# Altium PCB Main.PcbDoc (part 3 of 3)
Units mm, origin at the board's own origin, x right, y up, seen from the top; angles counter-clockwise.
Board outline 231.52 x 36.7 mm, 2 copper layers (Top Layer, Bottom Layer); 134 components, 130 nets, 558 pads, 347 vias.
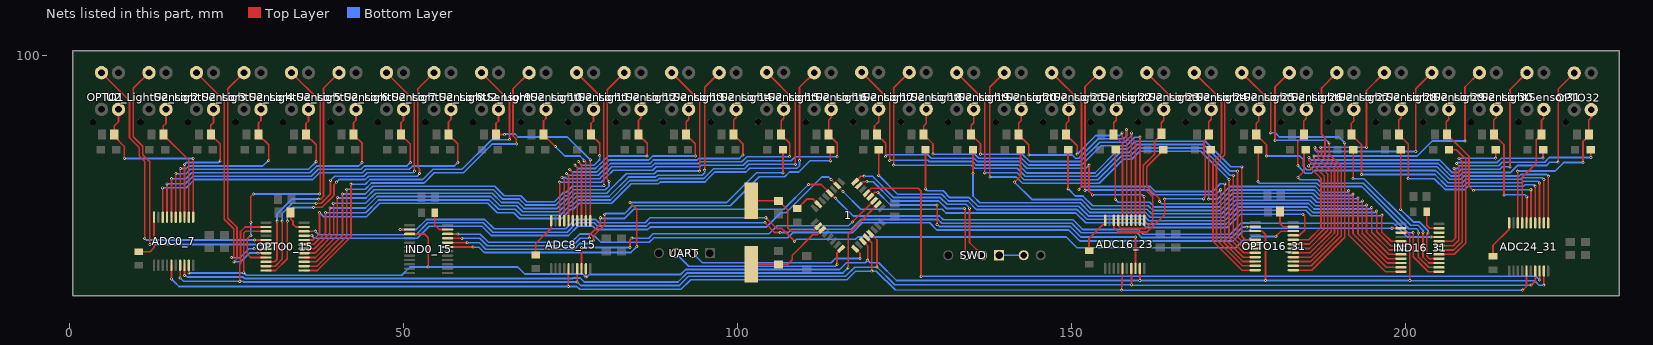
[diagram p2: the nets of this part, all layers, seen from the top]

## Via types
v1: diameter 0.45, hole 0.2, Top Layer to Bottom Layer, 297 vias
v2: diameter 1.27, hole 0.711, Top Layer to Bottom Layer, 44 vias
v3: diameter 3.5, hole 3, Top Layer to Bottom Layer, 6 vias

## Nets (pads, with @x,y where several pads share a name; then routed paths per layer and width w, separated by ;. In a path a pad name is that pad's centre, name@x,y a point inside that pad or via, vN(x,y) a via of type N, cw(c..) or ccw(c..) an arc to the next point about the centre after c; other vN are vias at no path point) (continued)
LED_IND15: IND0_15.19 L1_IndicatorLED15.K | length 64.2
  Top Layer w0.254: IND0_15.19@56.642,71.322 v1(60.452,71.322) ; v1(83.947,77.978) 84.963,76.962 v1(84.963,71.374) ; v1(106.839,82.423) L1_IndicatorLED15.K@106.839,85.852
  Bottom Layer w0.254: v1(60.452,71.322) 60.496,71.278 61.338,71.278 62.131,70.485 84.074,70.485 v1(84.963,71.374) ; v1(83.947,77.978) 98.425,77.978 102.87,82.423 v1(106.839,82.423)
LED_IND16: IND0_15.20 L1_IndicatorLED16.K | length 66.2
  Top Layer w0.254: IND0_15.20@56.642,71.972 59.526,71.972 v1(59.563,72.009) ; v1(78.486,72.263) 78.486,72.997 80.137,74.648 v1(80.137,76.2) ; v1(113.919,84.201) 113.919,85.82 L1_IndicatorLED16.K@113.951,85.852
  Bottom Layer w0.254: v1(59.563,72.009) 59.644,71.928 61.406,71.928 62.341,70.993 75.581,70.993 76.435,71.847 78.07,71.847 v1(78.486,72.263) ; v1(80.137,76.2) 80.264,76.327 83.153,76.327 84.296,77.47 98.933,77.47 103.28,81.817 107.09,81.817 107.809,82.535 109.205,82.535 110.871,84.201 v1(113.919,84.201)
LED_IND17: IND16_31.5 L1_IndicatorLED17.K | length 89.3
  Top Layer w0.254: v1(121.162,82.042) 121.19,82.07 L1_IndicatorLED17.K@121.19,85.852 ; v1(196.469,76.073) 196.469,73.564 197.863,72.17 IND16_31.5@199.334,72.17
  Bottom Layer w0.254: v1(121.162,82.042) 123.985,79.219 130.593,79.219 131.609,78.203 134.522,78.203 135.813,76.912 150.886,76.912 152.34,75.458 160.68,75.458 161.384,74.754 173.143,74.754 175.195,76.806 185.068,76.806 185.899,75.975 196.371,75.975 v1(196.469,76.073)
LED_IND18: IND16_31.6 L1_IndicatorLED18.K | length 84.3
  Top Layer w0.254: v1(128.143,80.01) 128.175,80.042 L1_IndicatorLED18.K@128.175,85.852 ; v1(195.707,76.708) 195.707,73.607 197.794,71.52 IND16_31.6@199.334,71.52
  Bottom Layer w0.254: v1(128.143,80.01) 128.426,79.727 130.803,79.727 131.819,78.711 134.732,78.711 136.023,77.42 151.096,77.42 152.551,75.966 160.89,75.966 161.594,75.262 172.932,75.262 174.984,77.314 185.278,77.314 186.109,76.483 195.482,76.483 v1(195.707,76.708)
LED_IND19: IND16_31.7 L1_IndicatorLED19.K | length 78.3
  Top Layer w0.254: v1(135.287,82.296) L1_IndicatorLED19.K@135.287,85.852 ; v1(194.945,77.216) 194.945,73.533 197.608,70.87 IND16_31.7@199.334,70.87
  Bottom Layer w0.254: v1(135.287,82.296) 135.287,78.939 136.297,77.928 151.307,77.928 152.761,76.474 161.101,76.474 161.805,75.77 172.722,75.77 174.774,77.822 185.489,77.822 186.32,76.991 194.72,76.991 v1(194.945,77.216)
LED_IND20: IND16_31.8 L1_IndicatorLED20.K | length 71.7
  Top Layer w0.254: v1(141.478,81.026) 142.399,81.947 L1_IndicatorLED20.K@142.399,85.852 ; v1(194.183,77.597) 194.183,73.533 197.496,70.22 IND16_31.8@199.334,70.22
  Bottom Layer w0.254: v1(141.478,81.026) 144.068,78.436 151.517,78.436 152.972,76.982 161.311,76.982 162.015,76.278 172.512,76.278 174.564,78.33 185.699,78.33 186.53,77.499 194.085,77.499 v1(194.183,77.597)
LED_IND21: IND16_31.9 L1_IndicatorLED21.K | length 64.7
  Top Layer w0.254: v1(149.511,80.01) L1_IndicatorLED21.K@149.511,85.852 ; v1(193.548,78.232) 193.548,73.395 197.373,69.57 IND16_31.9@199.334,69.57
  Bottom Layer w0.254: v1(149.511,80.01) 150.577,78.944 151.728,78.944 153.182,77.49 161.521,77.49 162.225,76.786 172.301,76.786 174.353,78.838 185.91,78.838 186.741,78.007 193.323,78.007 v1(193.548,78.232)
LED_IND22: IND16_31.10 L1_IndicatorLED22.K | length 59
  Top Layer w0.254: v1(156.591,78.436) 156.591,85.82 L1_IndicatorLED22.K@156.623,85.852 ; v1(192.913,78.613) 192.913,73.312 197.305,68.92 IND16_31.10@199.334,68.92
  Bottom Layer w0.254: v1(156.591,78.436) 157.029,77.998 161.732,77.998 162.436,77.294 172.091,77.294 174.143,79.346 186.12,79.346 186.951,78.515 192.815,78.515 v1(192.913,78.613)
LED_IND23: IND16_31.11 L1_IndicatorLED23.K | length 55.1
  Top Layer w0.254: v1(163.195,78.12) 163.195,78.516 161.29,80.421 161.29,83.325 L1_IndicatorLED23.K@163.773,85.808 ; L1_IndicatorLED23.K@163.732,85.849 L1_IndicatorLED23.K@163.735,85.852 ; v1(192.151,79.248) 192.151,73.274 197.155,68.27 IND16_31.11@199.334,68.27
  Bottom Layer w0.254: v1(163.195,78.12) 163.513,77.802 171.88,77.802 173.932,79.854 186.331,79.854 187.162,79.023 191.926,79.023 v1(192.151,79.248)
LED_IND24: IND16_31.12 L1_IndicatorLED24.K | length 46.4
  Top Layer w0.254: v1(170.561,78.486) 170.561,85.566 L1_IndicatorLED24.K@170.847,85.852 ; v1(191.516,79.756) 191.516,73.115 197.011,67.62 IND16_31.12@199.334,67.62
  Bottom Layer w0.254: v1(170.561,78.486) 171.846,78.486 173.722,80.362 186.541,80.362 187.372,79.531 191.291,79.531 v1(191.516,79.756)
LED_IND25: IND16_31.13 L1_IndicatorLED25.K | length 39.6
  Top Layer w0.254: v1(177.927,81.089) 177.959,81.121 L1_IndicatorLED25.K@177.959,85.852 ; v1(201.168,73.448) 201.168,69.854 203.402,67.62 IND16_31.13@205.034,67.62
  Bottom Layer w0.254: v1(177.927,81.089) 178.146,80.87 186.751,80.87 187.259,80.362 193.45,80.362 200.364,73.448 v1(201.168,73.448)
LED_IND26: IND16_31.14 L1_IndicatorLED26.K | length 33.7
  Top Layer w0.254: v1(183.896,81.719) 184.831,82.654 184.831,85.612 L1_IndicatorLED26.K@185.071,85.852 ; v1(201.93,73.406) 201.93,69.81 203.47,68.27 IND16_31.14@205.034,68.27
  Bottom Layer w0.254: v1(183.896,81.719) 184.237,81.378 186.962,81.378 187.47,80.87 193.704,80.87 200.52,74.054 201.663,74.054 201.93,73.787 v1(201.93,73.406)
LED_IND27: IND16_31.15 L1_IndicatorLED27.K | length 24.8
  Top Layer w0.254: v1(192.151,81.534) 192.183,81.566 L1_IndicatorLED27.K@192.183,85.852 ; v1(202.634,73.501) 202.634,69.825 203.539,68.92 IND16_31.15@205.034,68.92
  Bottom Layer w0.254: v1(192.151,81.534) 193.802,81.534 200.774,74.562 201.873,74.562 202.692,73.743 202.634,73.685 v1(202.634,73.501)
LED_IND28: IND16_31.16 L1_IndicatorLED28.K | length 20.2
  Top Layer w0.254: v1(199.263,76.962) 199.295,76.994 L1_IndicatorLED28.K@199.295,85.852 ; v1(203.396,73.406) 203.2,73.21 203.2,69.977 203.607,69.57 IND16_31.16@205.034,69.57
  Bottom Layer w0.254: v1(199.263,76.962) 201.155,75.07 202.084,75.07 203.396,73.758 v1(203.396,73.406)
LED_IND29: IND16_31.17 L1_IndicatorLED29.K | length 20.3
  Top Layer w0.254: IND16_31.17@205.034,70.22 207.32,70.22 209.013,71.913 209.013,84.452 207.613,85.852 L1_IndicatorLED29.K@206.534,85.852
LED_IND30: IND16_31.18 L1_IndicatorLED30.K | length 23.8
  Top Layer w0.254: IND16_31.18@205.034,70.87 207.252,70.87 208.505,72.123 208.505,84.103 v1(208.026,84.582) ; v1(213.519,84.614) L1_IndicatorLED30.K@213.519,85.852 213.646,85.725 L1_IndicatorLED30.K@213.646,85.969
  Bottom Layer w0.254: v1(208.026,84.582) 208.058,84.614 v1(213.519,84.614)
LED_IND31: IND16_31.19 L1_IndicatorLED31.K | length 29.5
  Top Layer w0.254: IND16_31.19@205.034,71.52 207.183,71.52 207.997,72.334 207.997,83.468 v1(207.645,83.82) ; v1(220.599,84.614) 220.599,85.82 L1_IndicatorLED31.K@220.631,85.852
  Bottom Layer w0.254: v1(207.645,83.82) 207.801,83.976 213.741,83.976 214.379,84.614 v1(220.599,84.614)
LED_IND32: IND16_31.20 L1_IndicatorLED32.K | length 35.5
  Top Layer w0.254: IND16_31.20@205.034,72.17 207.044,72.17 207.489,72.615 207.489,82.833 v1(207.264,83.058) ; v1(227.743,84.709) L1_IndicatorLED32.K@227.743,85.852
  Bottom Layer w0.254: v1(207.264,83.058) 207.74,83.058 208.15,83.468 213.951,83.468 214.491,84.008 220.85,84.008 221.551,84.709 v1(227.743,84.709)
LED_SENS1: OPTO0_15.5 OPTO1.K | length 45.7
  Top Layer w0.254: OPTO1.K@4.83,97.409 9.017,93.222 9.017,87.674 10.487,86.204 10.487,84.934 11.303,84.118 v1(11.303,72.622) ; v1(27.723,72.353) OPTO0_15.5@29.464,72.353
  Bottom Layer w0.254: v1(11.303,72.622) 11.572,72.353 v1(27.723,72.353)
LED_SENS2: OPTO0_15.6 U2_LightSensor2.K | length 45.2
  Top Layer w0.254: U2_LightSensor2.K@11.938,97.409 9.604,95.075 9.604,87.805 10.995,86.414 10.995,85.144 12.059,84.08 v1(12.059,71.686) ; v1(28.243,71.686) 29.447,71.686 OPTO0_15.6@29.464,71.703 OPTO0_15.6@29.441,71.726
  Bottom Layer w0.254: v1(12.059,71.686) v1(28.243,71.686)
LED_SENS3: OPTO0_15.7 U2_LightSensor3.K | length 36
  Top Layer w0.254: U2_LightSensor3.K@19.05,97.409 23.212,93.247 23.212,75.453 24.615,74.05 24.615,69.954 24.384,69.723 v1(24.257,69.723) ; v1(27.686,71.058) 29.459,71.058 OPTO0_15.7@29.464,71.053
  Bottom Layer w0.254: v1(24.257,69.723) 25.571,69.723 26.905,71.058 v1(27.686,71.058)
LED_SENS4: OPTO0_15.8 U2_LightSensor4.K | length 35.5
  Top Layer w0.254: v1(24.638,69.088) 25.123,69.573 25.123,74.261 23.749,75.635 23.749,94.996 U2_LightSensor4.K@26.162,97.409 ; v1(28.255,70.403) OPTO0_15.8@29.464,70.403
  Bottom Layer w0.254: v1(24.638,69.088) 25.654,69.088 26.969,70.403 v1(28.255,70.403)
LED_SENS5: OPTO0_15.9 U2_LightSensor5.K | length 42.3
  Top Layer w0.254: v1(27.178,73.067) 26.647,72.536 26.647,70.254 27.148,69.753 OPTO0_15.9@29.464,69.753 ; v1(27.178,75) 27.178,78.867 v1(27.559,79.248) ; U2_LightSensor5.K@33.274,97.409 37.563,93.12 37.563,79.346 v1(37.465,79.248)
  Bottom Layer w0.254: v1(27.178,73.067) v1(27.178,75) ; v1(27.559,79.248) v1(37.465,79.248)
LED_SENS6: OPTO0_15.10 U2_LightSensor6.K | length 36.1
  Top Layer w0.254: OPTO0_15.10@29.464,69.103 30.749,69.103 31.115,69.469 v1(31.115,75.184) ; v1(37.338,78.486) 37.643,78.486 38.071,78.914 38.071,95.094 U2_LightSensor6.K@40.386,97.409
  Bottom Layer w0.254: v1(31.115,75.184) 31.115,76.286 33.315,78.486 v1(37.338,78.486)
LED_SENS7: OPTO0_15.11 U2_LightSensor7.K | length 49.8
  Top Layer w0.254: OPTO0_15.11@29.464,68.453 30.817,68.453 31.877,69.513 v1(31.877,75.184) ; v1(36.957,77.851) 37.727,77.851 39.018,79.142 39.018,79.201 39.116,79.299 v1(39.116,81.28) ; U2_LightSensor7.K@47.498,97.409 51.66,93.247 51.66,82.706 v1(51.689,82.677)
  Bottom Layer w0.254: v1(31.877,75.184) 31.877,76.329 33.399,77.851 v1(36.957,77.851) ; v1(39.116,81.28) 39.751,81.915 44.099,81.915 44.607,82.423 51.455,82.423 51.689,82.657 v1(51.689,82.677)
LED_SENS8: OPTO0_15.12 U2_LightSensor8.K | length 50.2
  Top Layer w0.254: OPTO0_15.12@29.464,67.803 30.886,67.803 32.639,69.556 v1(32.639,75.184) ; v1(36.576,77.216) 36.639,77.279 36.671,77.279 36.706,77.245 37.839,77.245 39.526,78.932 39.526,78.991 39.624,79.089 39.624,80.637 40.005,81.018 v1(40.005,81.026) ; v1(52.422,82.325) 52.422,82.337 52.387,82.372 52.387,82.499 52.422,82.533 52.422,83.035 52.168,83.289 52.168,94.967 U2_LightSensor8.K@54.61,97.409
  Bottom Layer w0.254: v1(32.639,75.184) 32.639,76.373 33.482,77.216 v1(36.576,77.216) ; v1(40.005,81.026) 40.013,81.026 40.394,81.407 44.309,81.407 44.817,81.915 52.07,81.915 52.422,82.267 v1(52.422,82.325)
LED_SENS9: OPTO0_15.13 U2_LightSensor9.K | length 55.2
  Top Layer w0.254: OPTO0_15.13@35.164,67.803 37.152,67.803 42.164,72.815 v1(42.164,80.707) ; U2_LightSensor9.K@61.722,97.409 65.913,93.218 v1(65.913,87.376)
  Bottom Layer w0.254: v1(42.164,80.707) 44.328,80.707 45.028,81.407 52.927,81.407 54.451,82.931 58.801,82.931 63.246,87.376 v1(65.913,87.376)
LED_SENS10: OPTO0_15.14 U2_LightSensor10.K | length 55.4
  Top Layer w0.254: OPTO0_15.14@35.164,68.453 37.084,68.453 41.529,72.898 v1(41.529,79.957) ; v1(66.929,86.741) 66.929,87.471 66.421,87.979 66.421,94.996 U2_LightSensor10.K@68.834,97.409
  Bottom Layer w0.254: v1(41.529,79.957) 44.296,79.957 45.238,80.899 53.137,80.899 54.661,82.423 59.011,82.423 63.329,86.741 v1(66.929,86.741)
LED_SENS11: OPTO0_15.15 U2_LightSensor11.K | length 73.7
  Top Layer w0.254: OPTO0_15.15@35.164,69.103 36.968,69.103 40.894,73.029 v1(40.894,79.248) ; U2_LightSensor11.K@75.946,97.409 80.01,93.345 v1(80.01,80.518)
  Bottom Layer w0.254: v1(40.894,79.248) 44.306,79.248 45.449,80.391 63.72,80.391 65.117,78.994 67.608,78.994 68.497,78.105 72.635,78.105 74.032,79.502 74.386,79.502 75.275,80.391 79.883,80.391 v1(80.01,80.518)
LED_SENS12: OPTO0_15.16 U2_LightSensor12.K | length 73.5
  Top Layer w0.254: OPTO0_15.16@35.164,69.753 36.86,69.753 40.132,73.025 v1(40.132,78.74) ; v1(80.808,81.153) 80.518,81.443 80.518,94.869 U2_LightSensor12.K@83.058,97.409
  Bottom Layer w0.254: v1(40.132,78.74) 40.19,78.74 40.288,78.642 44.418,78.642 45.659,79.883 63.509,79.883 64.906,78.486 67.398,78.486 68.287,77.597 72.846,77.597 74.243,78.994 74.596,78.994 75.485,79.883 80.246,79.883 80.808,80.445 v1(80.808,81.153)
LED_SENS13: OPTO0_15.17 U2_LightSensor13.K | length 85.5
  Top Layer w0.254: OPTO0_15.17@35.164,70.403 36.748,70.403 39.611,73.266 39.611,77.838 39.598,77.851 v1(39.497,77.851) ; U2_LightSensor13.K@90.17,97.409 94.361,93.218 v1(94.361,82.677)
  Bottom Layer w0.254: v1(39.497,77.851) 44.345,77.851 45.869,79.375 63.299,79.375 64.696,77.978 67.187,77.978 68.076,77.089 73.056,77.089 74.453,78.486 74.807,78.486 75.696,79.375 80.456,79.375 81.316,80.235 83.377,82.296 87.58,82.296 87.961,82.677 v1(94.361,82.677)
LED_SENS14: OPTO0_15.18 U2_LightSensor14.K | length 84.6
  Top Layer w0.254: OPTO0_15.18@35.164,71.053 36.676,71.053 39.005,73.382 v1(39.005,77.14) ; v1(95.123,82.804) 95.123,95.25 U2_LightSensor14.K@97.282,97.409
  Bottom Layer w0.254: v1(39.005,77.14) 44.353,77.14 46.08,78.867 63.088,78.867 64.485,77.47 66.977,77.47 67.866,76.581 73.266,76.581 74.663,77.978 75.017,77.978 75.906,78.867 80.805,78.867 83.726,81.788 87.79,81.788 88.073,82.071 94.742,82.071 95.123,82.452 v1(95.123,82.804)
LED_SENS15: OPTO0_15.19 U2_LightSensor15.K | length 97.7
  Top Layer w0.254: OPTO0_15.19@35.164,71.703 36.607,71.703 38.354,73.45 v1(38.354,76.454) ; U2_LightSensor15.K@104.394,97.448 108.712,93.13 108.68,93.098 v1(108.68,83.693)
  Bottom Layer w0.254: v1(38.354,76.454) 44.385,76.454 46.29,78.359 62.878,78.359 64.275,76.962 66.766,76.962 67.655,76.073 73.477,76.073 74.874,77.47 75.228,77.47 76.117,78.359 81.016,78.359 83.937,81.28 88.001,81.28 88.284,81.563 94.952,81.563 96.433,83.043 101.085,83.043 101.735,83.693 v1(108.68,83.693)
LED_SENS16: OPTO0_15.20 U2_LightSensor16.K | length 97.9
  Top Layer w0.254: OPTO0_15.20@35.164,72.353 36.539,72.353 37.465,73.279 v1(37.465,76.45) ; v1(109.318,84.23) 109.318,95.221 U2_LightSensor16.K@111.506,97.409
  Bottom Layer w0.254: v1(37.465,76.45) 37.501,76.45 38.103,75.848 44.498,75.848 46.501,77.851 62.668,77.851 64.065,76.454 66.556,76.454 67.445,75.565 73.687,75.565 75.084,76.962 75.438,76.962 76.327,77.851 81.226,77.851 84.147,80.772 88.211,80.772 88.494,81.055 95.163,81.055 96.643,82.535 101.296,82.535 101.847,83.087 108.931,83.087 109.318,83.474 v1(109.318,84.23)
LED_SENS17: OPTO16_31.5 U2_LightSensor17.K | length 84.6
  Top Layer w0.254: U2_LightSensor17.K@118.618,97.448 122.809,93.257 v1(122.809,84.296) ; v1(175.514,83.312) 175.514,72.904 176.025,72.393 176.784,72.393 176.791,72.4 OPTO16_31.5@177.517,72.4
  Bottom Layer w0.254: v1(122.809,84.296) 122.812,84.299 128.495,84.299 128.497,84.301 128.695,84.103 129.747,84.103 129.75,84.106 135.215,84.106 135.726,83.595 142.12,83.595 143.321,82.394 153.527,82.394 157.112,85.979 158.41,85.979 159.582,87.151 170.02,87.151 173.859,83.312 v1(175.514,83.312)
LED_SENS18: OPTO16_31.6 U2_LightSensor18.K | length 83.6
  Top Layer w0.254: v1(123.415,83.566) 123.415,95.133 U2_LightSensor18.K@125.73,97.448 ; v1(174.879,82.677) 174.879,72.821 175.95,71.75 OPTO16_31.6@177.517,71.75
  Bottom Layer w0.254: v1(123.415,83.566) 135.037,83.566 135.516,83.087 141.909,83.087 143.11,81.886 153.738,81.886 157.323,85.471 158.621,85.471 159.793,86.643 169.81,86.643 173.776,82.677 v1(174.879,82.677)
LED_SENS19: OPTO16_31.7 U2_LightSensor19.K | length 71.3
  Top Layer w0.254: U2_LightSensor19.K@132.842,97.409 137.033,93.218 v1(137.033,82.423) ; v1(174.244,82.042) 174.244,72.737 175.881,71.1 OPTO16_31.7@177.517,71.1
  Bottom Layer w0.254: v1(137.033,82.423) 141.855,82.423 142.9,81.378 153.948,81.378 157.533,84.963 158.831,84.963 160.003,86.135 169.599,86.135 173.692,82.042 v1(174.244,82.042)
LED_SENS20: OPTO16_31.8 U2_LightSensor20.K | length 70
  Top Layer w0.254: v1(137.795,81.788) 137.795,95.25 U2_LightSensor20.K@139.954,97.409 ; v1(173.609,81.407) 173.609,72.654 175.813,70.45 OPTO16_31.8@177.517,70.45
  Bottom Layer w0.254: v1(137.795,81.788) 141.771,81.788 142.689,80.87 154.158,80.87 157.743,84.455 159.042,84.455 160.214,85.627 169.389,85.627 v1(173.609,81.407)
LED_SENS21: OPTO16_31.9 U2_LightSensor21.K | length 56.1
  Top Layer w0.254: U2_LightSensor21.K@147.066,97.409 151.511,92.964 151.511,80.338 v1(151.13,79.957) ; v1(172.974,80.772) 172.974,72.57 175.744,69.8 OPTO16_31.9@177.517,69.8
  Bottom Layer w0.254: v1(151.13,79.957) 151.535,80.362 161.827,80.362 162.56,79.629 169.337,79.629 169.338,79.63 170.26,79.63 170.261,79.629 171.149,79.629 172.292,80.772 v1(172.974,80.772)
LED_SENS22: OPTO16_31.10 U2_LightSensor22.K | length 53.5
  Top Layer w0.254: v1(152.027,79.756) 152.027,95.258 U2_LightSensor22.K@154.178,97.409 ; v1@172.339,79.913 v1(172.339,79.883) 172.339,72.487 175.676,69.15 OPTO16_31.10@177.517,69.15
  Bottom Layer w0.254: v1(152.027,79.756) 152.125,79.854 161.603,79.854 162.336,79.121 169.547,79.121 169.548,79.122 170.05,79.122 170.051,79.121 171.577,79.121 v1(172.339,79.883)
LED_SENS23: OPTO16_31.11 U2_LightSensor23.K | length 42.5
  Top Layer w0.254: U2_LightSensor23.K@161.29,97.409 164.846,93.853 v1(168.529,93.853) ; v1(172.974,93.853) 172.974,85.134 171.733,83.893 171.733,72.374 175.608,68.5 OPTO16_31.11@177.517,68.5
  Bottom Layer w0.254: v1(168.529,93.853) v1(172.974,93.853)
LED_SENS24: OPTO16_31.12 U2_LightSensor24.K | length 35.5
  Top Layer w0.254: U2_LightSensor24.K@168.402,97.409 172.466,93.345 172.466,85.344 171.196,84.074 171.196,72.193 175.539,67.85 OPTO16_31.12@177.517,67.85
LED_SENS25: OPTO16_31.13 U2_LightSensor25.K | length 46.4
  Top Layer w0.254: U2_LightSensor25.K@175.514,97.409 179.832,93.091 v1(179.832,88.392) ; OPTO16_31.13@183.217,67.85 185.99,67.85 190.91,72.77 v1(190.91,86.897)
  Bottom Layer w0.254: v1(179.832,88.392) 180.499,88.392 181.105,87.786 190.021,87.786 v1(190.91,86.897)
LED_SENS26: OPTO16_31.14 U2_LightSensor26.K | length 43
  Top Layer w0.254: v1(180.496,87.278) 180.475,87.299 180.475,95.242 180.467,95.25 U2_LightSensor26.K@182.626,97.409 ; OPTO16_31.14@183.217,68.5 185.922,68.5 190.402,72.98 190.402,83.41 188.595,85.217 v1(188.595,86.897)
  Bottom Layer w0.254: v1(180.496,87.278) 188.185,87.278 188.566,86.897 v1(188.595,86.897)
LED_SENS27: OPTO16_31.15 U2_LightSensor27.K | length 34.5
  Top Layer w0.254: OPTO16_31.15@183.217,69.15 185.853,69.15 189.894,73.191 189.894,83.2 187.96,85.134 187.96,87.659 187.452,88.167 187.452,95.123 U2_LightSensor27.K@189.738,97.409
LED_SENS28: OPTO16_31.16 U2_LightSensor28.K | length 40.6
  Top Layer w0.254: OPTO16_31.16@183.217,69.8 185.785,69.8 189.386,73.401 189.386,82.989 187.452,84.923 187.452,86.04 v1(187.259,86.233) ; v1(194.183,86.233) 194.183,94.742 U2_LightSensor28.K@196.85,97.409
  Bottom Layer w0.254: v1(187.259,86.233) v1(194.183,86.233)
LED_SENS29: OPTO16_31.17 U2_LightSensor29.K | length 49
  Top Layer w0.254: OPTO16_31.17@183.217,70.45 185.716,70.45 188.878,73.612 188.878,82.677 186.944,84.611 186.944,85.691 186.436,86.199 v1(186.436,86.233) ; v1(201.549,85.598) 201.549,94.996 U2_LightSensor29.K@203.962,97.409
  Bottom Layer w0.254: v1(186.436,86.233) 186.436,85.852 186.69,85.598 v1(201.549,85.598)
LED_SENS30: OPTO16_31.18 U2_LightSensor30.K | length 52.9
  Top Layer w0.254: OPTO16_31.18@183.217,71.1 185.648,71.1 188.37,73.822 188.37,82.235 186.32,84.285 v1(186.32,84.934) ; v1(208.923,87.187) 208.923,95.258 U2_LightSensor30.K@211.074,97.409
  Bottom Layer w0.254: v1(186.32,84.934) 201.774,84.934 204.027,87.187 v1(208.923,87.187)
LED_SENS31: OPTO16_31.19 U2_LightSensor31.K | length 63.8
  Top Layer w0.254: OPTO16_31.19@183.217,71.75 185.579,71.75 187.862,74.032 187.862,81.952 185.74,84.074 185.732,84.074 185.547,84.259 v1(185.547,84.709) ; v1(215.646,83.312) 215.646,94.869 U2_LightSensor31.K@218.186,97.409
  Bottom Layer w0.254: v1(185.547,84.709) 185.928,84.328 205.137,84.328 207.013,82.452 207.852,82.452 208.36,82.96 214.162,82.96 214.514,83.312 v1(215.646,83.312)
LED_SENS32: OPTO16_31.20 OPTO32.K | length 68.4
  Top Layer w0.254: OPTO16_31.20@183.217,72.4 185.511,72.4 187.354,74.243 187.354,81.603 v1(185.489,83.468) ; v1(222.863,84.008) 222.863,94.957 OPTO32.K@225.271,97.365
  Bottom Layer w0.254: v1(185.489,83.468) 185.841,83.82 204.927,83.82 206.803,81.944 208.063,81.944 208.571,82.452 215.675,82.452 216.723,83.5 221.06,83.5 221.568,84.008 v1(222.863,84.008)
LedPanelRX: 1.9 UART.2 | length 27.6
  Top Layer w0.254: 1.9@117.641,71.058 118.364,70.335 v1(118.364,69.596)
  Bottom Layer w0.254: UART.2@93.345,70.399 94.783,68.961 114.046,68.961 114.681,69.596 v1(118.364,69.596)
LedPanelTX: 1.8 UART.3 | length 27.7
  Top Layer w0.254: v1(114.947,68.707) 114.935,68.719 114.935,70.462 1.8@115.531,71.058
  Bottom Layer w0.254: UART.3@90.805,70.399 92.751,68.453 114.693,68.453 v1(114.947,68.707)
MISO: 1.12 ADC0_7.15 ADC8_15.15 ADC16_23.15 ADC24_31.15 | length 222.1
  Top Layer w0.254: v1(15.3,66.548) ADC0_7.15@15.3,68.58 ; v1(74.705,65.405) 74.705,67.967 74.676,67.996 ADC8_15.15@74.736,68.056 ; 1.12@119.338,72.755 120.142,71.951 v1(120.142,67.691) ; v1(157.54,64.845) 157.648,68.111 ADC16_23.15@157.667,68.685 ; v1(217.551,64.845) 218.119,65.413 ADC24_31.15@218.119,67.725
  Bottom Layer w0.254: v1(15.3,66.548) 15.865,65.983 16.062,65.786 16.443,65.405 v1(74.705,65.405) 75.99,65.405 76.42,64.974 91.577,64.974 93.024,66.421 116.415,66.421 117.685,67.691 v1(120.142,67.691) 120.821,67.691 123.615,64.897 v1(157.54,64.845) v1@217.424,64.845
MOSI: 1.13 ADC0_7.17 ADC8_15.17 ADC16_23.17 ADC24_31.17 OPTO0_15.2 | length 231.3
  Top Layer w0.254: v1(16.6,66.675) ADC0_7.17@16.6,68.58 ; v1(25.527,66.167) 25.527,68.751 25.631,68.855 25.631,73.629 26.305,74.303 OPTO0_15.2@29.464,74.303 ; v1(76.031,66.082) 76.031,68.051 ADC8_15.17@76.036,68.056 ; 1.13@119.923,73.339 120.904,72.358 v1(120.904,68.326) ; ADC16_23.17@158.967,68.685 159.004,68.648 v1(159.004,65.659) ; v1(218.821,65.614) 219.419,66.212 ADC24_31.17@219.419,67.725
  Bottom Layer w0.254: v1(16.6,66.675) 17.108,66.167 v1(25.527,66.167) 25.952,66.167 26.037,66.082 v1(76.031,66.082) 76.552,65.561 76.806,65.561 91.334,65.561 92.702,66.929 116.205,66.929 117.573,68.297 120.875,68.297 v1(120.904,68.326) 123.571,65.659 v1(159.004,65.659) 159.056,65.607 v1@218.814,65.607
Net1_2: 1.2 Cq.2@106.172,78.216 Q.2 | length 13.8
  Top Layer w0.254: Q.2@102.108,78.22 102.112,78.216 Cq.2@106.172,78.216 107.539,76.849 107.539,74.198 108.077,73.66 111.345,73.66 1.2@112.136,74.452
Net1_3: 1.3 Cq.2@106.172,68.723 Q.1 | length 13.1
  Top Layer w0.254: Q.1@102.108,68.72 106.169,68.72 Cq.2@106.172,68.723 107.539,68.723 108.204,69.388 108.204,70.052 111.304,73.152 111.968,73.152 1.3@112.702,73.886
Net1_5: 
Net1_31: 1.31 R.2 | length 4.1
  Top Layer w0.254: R.2@108.966,77.073 110.379,78.486 111.345,78.486 1.31@112.136,77.694
Net*_2: SWD.1 Vcc.2 | length 3.7
  Bottom Layer w0.254: SWD.1@139.192,70.078 Vcc.2@142.875,70.078
NetR1_IND0_15_1: IND0_15.23 R1.1@54.721,76.454 | length 4.1
  Top Layer w0.254: R1.1@54.721,76.454 54.721,74.573 55.372,73.922 IND0_15.23@56.642,73.922
NetR1_IND16_31_1: IND16_31.23 R1.1@203.184,76.581 | length 4.1
  Top Layer w0.254: R1.1@203.184,76.581 203.184,74.565 203.629,74.12 IND16_31.23@205.034,74.12
NetR3_OPTO0_15_1: OPTO0_15.23 R3.1@33.158,76.454 | length 3.7
  Top Layer w0.254: R3.1@33.158,76.454 33.158,75.522 33.245,75.435 33.512,75.168 33.512,74.692 33.901,74.303 OPTO0_15.23@35.164,74.303
NetR3_OPTO16_31_1: OPTO16_31.23 R3.1@181.24,76.656 | length 4
  Top Layer w0.254: R3.1@181.24,76.656 181.24,74.792 181.733,74.299 OPTO16_31.23@183.217,74.299
NetR6_ADC0_7_1: ADC0_7.10 R6.1@10.414,70.596 | length 7.1
  Top Layer w0.254: R6.1@10.414,70.596 12.116,70.596 12.7,71.18 ADC0_7.10@12.7,75.78
NetR6_ADC8_15_1: ADC8_15.10 R6.1@69.85,70.103 | length 6.1
  Top Layer w0.254: R6.1@69.85,70.103 69.85,71.834 72.136,74.12 ADC8_15.10@72.136,75.256
NetR6_ADC16_23_1: ADC16_23.10 R6.1@152.654,70.753 | length 6.1
  Top Layer w0.254: R6.1@152.654,70.753 152.654,72.622 155.067,75.035 ADC16_23.10@155.067,75.885
NetR6_ADC24_31_1: ADC24_31.10 R6.1@213.106,69.909 | length 6
  Top Layer w0.254: R6.1@213.106,69.909 213.106,71.576 215.519,73.989 ADC24_31.10@215.519,74.925
NetU1_IND0_15_2: IND0_15.2 OPTO16_31.22 | length 140.8
  Top Layer w0.254: v1(49.53,73.922) IND0_15.2@50.942,73.922 ; v1(104.267,75.692) 105.883,74.076 106.677,74.076 107.032,73.721 107.034,73.721 v1(108.585,72.17) ; v1(180.594,72.898) 180.616,72.898 181.367,73.649 OPTO16_31.22@183.217,73.649
  Bottom Layer w0.254: v1(49.53,73.922) 51.965,73.922 53.481,75.438 62.207,75.438 63.604,74.041 74.318,74.041 75.715,75.438 78.788,75.438 79.267,74.959 86.197,74.959 86.93,75.692 v1(104.267,75.692) ; v1(108.585,72.17) 108.869,72.454 117.662,72.454 118.028,72.82 149.231,72.82 150.853,71.198 174.616,71.198 175.811,72.393 176.527,72.393 177.032,72.898 v1(180.594,72.898)
NetU1_IND0_15_22: IND0_15.22 IND16_31.2 | length 147.4
  Top Layer w0.254: IND0_15.22@56.642,73.272 58.16,73.272 v1(58.166,73.266) ; v1(197.993,74.12) IND16_31.2@199.334,74.12
  Bottom Layer w0.254: v1(58.166,73.266) 58.204,73.228 61.543,73.228 62.762,72.009 75.16,72.009 76.401,73.25 78.102,73.25 78.425,72.927 78.679,72.927 79.597,72.009 86.839,72.009 87.532,72.702 107.542,72.702 108.31,73.47 117.241,73.47 118.701,74.93 128.81,74.93 129.876,73.864 149.623,73.864 151.274,72.214 174.195,72.214 175.67,73.689 176.527,73.689 176.958,74.12 v1(197.993,74.12)
NetU1_IND16_31_22: IND16_31.22
NetU3_OPTO0_15_22: OPTO0_15.22 OPTO16_31.2 | length 148.1
  Top Layer w0.254: OPTO0_15.22@35.164,73.653 36.81,73.653 v1(36.83,73.673) ; v1(104.14,74.959) 104.14,74.934 105.604,73.47 v1(106.426,73.47) ; v1(176.276,74.295) 177.513,74.295 OPTO16_31.2@177.517,74.299
  Bottom Layer w0.254: v1(36.83,73.673) 37.351,73.152 51.914,73.152 53.692,74.93 61.997,74.93 63.394,73.533 74.529,73.533 75.926,74.93 78.577,74.93 79.056,74.451 86.407,74.451 86.915,74.959 v1(104.14,74.959) ; v1(106.426,73.47) 107.591,73.47 108.099,73.978 117.031,73.978 118.491,75.438 130.048,75.438 130.606,74.88 150.044,74.88 151.499,73.426 159.838,73.426 160.542,72.722 173.985,72.722 175.558,74.295 v1(176.276,74.295)
O\E\_\I\N\D\: 1.28 IND0_15.21 IND16_31.21 | length 158.4
  Top Layer w0.254: IND0_15.21@56.642,72.622 v1(58.779,72.622) ; v1(77.851,72.644) 77.851,73.081 79.502,74.732 v1(79.502,75.692) ; v1(110.648,80.676) 112.549,80.676 1.28@113.834,79.391 114.612,78.613 v1(114.681,78.613) ; v1(203.806,72.8) 204.916,72.8 204.936,72.82 204.985,72.771 IND16_31.21@205.034,72.82
  Bottom Layer w0.254: v1(58.779,72.622) 58.772,72.615 61.438,72.615 62.552,71.501 75.371,71.501 76.514,72.644 v1(77.851,72.644) ; v1(79.502,75.692) 79.502,75.67 79.426,75.594 83.138,75.594 84.506,76.962 106.934,76.962 v1(110.648,80.676) ; v1(114.681,78.613) 117.348,75.946 130.258,75.946 130.816,75.388 150.255,75.388 151.709,73.934 160.048,73.934 160.752,73.23 173.774,73.23 175.445,74.901 176.527,74.901 176.581,74.847 198.221,74.847 200.268,72.8 v1(203.806,72.8)
O\E\_\O\P\T\O\: 1.26 OPTO0_15.21 OPTO16_31.21 | length 163.4
  Top Layer w0.254: OPTO0_15.21@35.164,73.003 35.186,73.025 35.212,72.999 v1(36.322,72.999) ; v1(114.046,81.407) v1(115.824,79.629) ; OPTO16_31.21@183.217,73.05 184.133,73.05 184.912,73.829 184.912,75.946 v1(184.658,76.2)
  Bottom Layer w0.254: v1(36.322,72.999) 36.699,72.622 52.102,72.622 53.902,74.422 61.786,74.422 63.183,73.025 74.739,73.025 76.136,74.422 78.367,74.422 78.846,73.943 86.617,73.943 86.969,74.295 104.333,74.295 106.492,76.454 107.283,76.454 112.617,81.788 113.665,81.788 v1(114.046,81.407) ; v1(115.824,79.629) 118.491,76.962 130.679,76.962 131.237,76.404 150.676,76.404 152.13,74.95 160.469,74.95 161.173,74.246 173.353,74.246 175.307,76.2 v1(184.658,76.2)
S\S\_\A\D\C\1\: 1.18 ADC0_7.18 | length 113.6
  Top Layer w0.254: v1(17.25,67.056) ADC0_7.18@17.25,68.58 ; v1(116.586,68.199) 116.586,73.245 1.18@121.036,77.694
  Bottom Layer w0.254: v1(17.25,67.056) 17.431,67.056 17.656,66.831 26.006,66.831 26.149,66.688 26.17,66.688 26.268,66.59 75.34,66.59 75.438,66.688 76.46,66.688 77.079,66.069 91.124,66.069 92.492,67.437 115.824,67.437 v1(116.586,68.199)
S\S\_\A\D\C\2\: 1.19 ADC8_15.18 | length 50.5
  Top Layer w0.254: ADC8_15.18@76.686,68.056 v1(76.686,71.241) ; v1(83.937,71.247) 83.937,72.38 v1(84.201,72.644) ; v1(117.221,75.057) 120.424,78.26 1.19@120.47,78.26
  Bottom Layer w0.254: v1(76.686,71.241) 83.931,71.241 v1(83.937,71.247) ; v1(84.201,72.644) 86.755,72.644 87.39,73.279 104.754,73.279 105.961,74.486 116.65,74.486 v1(117.221,75.057)
S\S\_\A\D\C\3\: 1.20 ADC16_23.18 | length 48.6
  Top Layer w0.254: 1.20@119.904,78.825 120.581,79.502 v1(121.031,79.502) ; v1(129.921,74.676) v1(129.921,77.597) ; v1(159.587,72.82) 159.587,68.759 159.639,68.707 ADC16_23.18@159.617,68.685
  Bottom Layer w0.254: v1(121.031,79.502) 122.936,77.597 v1(129.921,77.597) ; v1(129.921,74.676) 130.225,74.372 149.834,74.372 151.386,72.82 v1(159.587,72.82)
S\S\_\A\D\C\4\: 1.21 ADC24_31.18 | length 115.6
  Top Layer w0.254: 1.21@119.338,79.391 120.055,80.108 127.059,80.108 127.508,79.659 v1(127.508,66.929) ; ADC24_31.18@220.069,67.725 220.091,67.703 v1(220.091,66.369)
  Bottom Layer w0.254: v1(127.508,66.929) 219.531,66.929 v1(220.091,66.369)
SCK: 1.11 ADC0_7.19 ADC8_15.19 ADC16_23.19 ADC24_31.19 IND0_15.3 IND16_31.3 OPTO0_15.3 OPTO16_31.3 | length 249.8
  Top Layer w0.254: ADC0_7.19@17.9,68.58 17.907,68.573 v1(17.907,67.437) ; v1@26.139,67.421 v1(26.139,67.437) 26.139,73.419 26.394,73.673 29.444,73.673 OPTO0_15.3@29.464,73.653 ; IND0_15.3@50.942,73.272 53.166,73.272 53.736,72.703 53.736,68.341 v1(53.721,68.326) ; v1(77.336,66.802) ADC8_15.19@77.336,68.056 ; 1.11@118.773,72.189 119.507,71.455 v1(119.507,69.342) ; v1(160.259,66.294) 160.259,68.026 160.274,68.041 ADC16_23.19@160.259,68.056 ; OPTO16_31.3@177.517,73.649 178.573,73.649 179.07,73.152 v1(179.07,66.294) ; IND16_31.3@199.334,73.47 200.227,73.47 200.66,73.037 v1(200.66,66.294) ; ADC24_31.19@220.719,67.725 220.719,65.614 v1(220.726,65.607)
  Bottom Layer w0.254: v1(17.907,67.437) v1(26.139,67.437) 26.478,67.098 49.787,67.098 51.015,68.326 v1(53.721,68.326) 67.151,68.326 68.202,67.275 76.863,67.275 v1(77.336,66.802) 77.47,66.802 77.88,67.212 91.548,67.212 92.281,67.945 115.316,67.945 116.332,68.961 119.126,68.961 v1(119.507,69.342) 119.888,68.961 121.158,68.961 123.825,66.294 v1(160.259,66.294) v1(179.07,66.294) v1(200.66,66.294) 219.361,66.242 219.996,65.607 v1(220.726,65.607)
SENS1: ADC0_7.1 OPTO1.C R2_LightSensor1.2 | length 27.3
  Top Layer w0.254: OPTO1.C@7.37,91.909 7.37,90.047 6.742,89.419 R2_LightSensor1.2@6.742,88.138 6.742,87.873 8.255,86.36 v1(8.255,84.582) ; ADC0_7.1@18.55,75.78 v1(18.55,84.574)
  Bottom Layer w0.254: v1(8.255,84.582) 8.263,84.574 v1(18.55,84.574)
SENS2: ADC0_7.2 R2_LightSensor2.2 U2_LightSensor2.C | length 17.9
  Top Layer w0.254: U2_LightSensor2.C@14.478,91.909 14.478,89.8 14.097,89.419 R2_LightSensor2.2@14.097,88.138 17.9,84.335 ADC0_7.2@17.9,75.78
SENS3: ADC0_7.3 R2_LightSensor3.2 U2_LightSensor3.C | length 21.9
  Top Layer w0.254: ADC0_7.3@17.25,75.78 17.272,75.802 v1(17.272,83.693) ; U2_LightSensor3.C@21.59,91.909 21.59,89.916 21.209,89.535 R2_LightSensor3.2@21.209,88.138 22.606,86.741 v1(22.606,84.201)
  Bottom Layer w0.254: v1(17.272,83.693) 17.526,83.947 22.352,83.947 v1(22.606,84.201)
SENS4: ADC0_7.4 R2_LightSensor4.2 U2_LightSensor4.C | length 29.4
  Top Layer w0.254: ADC0_7.4@16.6,75.78 16.637,75.817 v1(16.637,83.058) ; U2_LightSensor4.C@28.702,91.909 28.702,90.248 28.321,89.867 R2_LightSensor4.2@28.321,88.138 29.845,86.614 v1(29.845,84.296)
  Bottom Layer w0.254: v1(16.637,83.058) 17.494,83.058 17.875,83.439 28.988,83.439 v1(29.845,84.296)
SENS5: ADC0_7.5 R2_LightSensor5.2 U2_LightSensor5.C | length 36.9
  Top Layer w0.254: ADC0_7.5@15.95,75.78 v1(15.95,82.296) ; U2_LightSensor5.C@35.814,91.909 35.814,90.17 35.433,89.789 R2_LightSensor5.2@35.433,88.138 36.957,86.614 v1(36.957,84.074)
  Bottom Layer w0.254: v1(15.95,82.296) 17.482,82.296 18.117,82.931 35.814,82.931 v1(36.957,84.074)
SENS6: ADC0_7.6 R2_LightSensor6.2 U2_LightSensor6.C | length 43.9
  Top Layer w0.254: ADC0_7.6@15.3,75.78 v1(15.3,81.534) ; U2_LightSensor6.C@42.926,91.909 42.926,90.297 42.545,89.916 R2_LightSensor6.2@42.545,88.138 43.837,86.846 v1(43.837,83.947)
  Bottom Layer w0.254: v1(15.3,81.534) 17.439,81.534 18.328,82.423 36.024,82.423 37.04,83.439 43.329,83.439 v1(43.837,83.947)
SENS7: ADC0_7.7 R2_LightSensor7.2 U2_LightSensor7.C | length 51.4
  Top Layer w0.254: ADC0_7.7@14.65,75.78 v1(14.65,80.772) ; U2_LightSensor7.C@50.038,91.909 50.038,90.297 49.657,89.916 R2_LightSensor7.2@49.657,88.138 51.054,86.741 v1(51.054,83.947)
  Bottom Layer w0.254: v1(14.65,80.772) 17.395,80.772 18.538,81.915 36.235,81.915 37.251,82.931 43.678,82.931 44.186,83.439 50.546,83.439 v1(51.054,83.947)
SENS8: ADC0_7.8 R2_LightSensor8.2 U2_LightSensor8.C | length 58.9
  Top Layer w0.254: v1(13.97,80.167) 14,80.137 ADC0_7.8@14,75.78 ; U2_LightSensor8.C@57.15,91.909 57.15,90.424 56.78,90.054 R2_LightSensor8.2@56.78,88.138 58.166,86.752 v1(58.166,83.947)
  Bottom Layer w0.254: v1(13.97,80.167) 13.971,80.166 17.508,80.166 18.749,81.407 36.445,81.407 37.461,82.423 43.888,82.423 44.396,82.931 50.895,82.931 51.403,83.439 57.658,83.439 v1(58.166,83.947)
SENS9: ADC8_15.1 R2_LightSensor9.2 U2_LightSensor9.C | length 28.8
  Top Layer w0.254: U2_LightSensor9.C@64.262,91.909 64.262,90.17 63.892,89.8 R2_LightSensor9.2@63.892,88.138 v1(65.151,88.138) ; ADC8_15.1@77.986,75.256 77.986,84.35 v1(77.99,84.354)
  Bottom Layer w0.254: v1(65.151,88.138) 65.249,88.236 66.736,88.236 67.186,87.786 74.558,87.786 v1(77.99,84.354)
SENS10: ADC8_15.2 R2_LightSensor10.2 U2_LightSensor10.C | length 20.8
  Top Layer w0.254: U2_LightSensor10.C@71.374,91.909 71.374,90.562 70.993,90.181 R2_LightSensor10.2@70.993,88.138 v1(72.771,86.36) ; v1(77.089,84.201) 77.194,84.201 77.336,84.059 ADC8_15.2@77.336,75.256
  Bottom Layer w0.254: v1(72.771,86.36) 74.197,84.934 76.461,84.934 77.089,84.306 v1(77.089,84.201)
SENS11: ADC8_15.3 R2_LightSensor11.2 U2_LightSensor11.C | length 21
  Top Layer w0.254: v1(76.2,84.103) 76.686,83.617 ADC8_15.3@76.686,75.256 ; U2_LightSensor11.C@78.486,91.909 78.486,90.17 78.105,89.789 R2_LightSensor11.2@78.105,88.138 79.397,86.846 v1(79.397,84.985)
  Bottom Layer w0.254: v1(76.2,84.103) 76.737,83.566 78.551,83.566 79.313,84.328 79.371,84.328 79.397,84.354 v1(79.397,84.985)
SENS12: ADC8_15.4 R2_LightSensor12.2 U2_LightSensor12.C | length 27.9
  Top Layer w0.254: v1(75.692,83.566) 76.036,83.222 ADC8_15.4@76.036,75.256 ; U2_LightSensor12.C@85.598,91.909 85.598,90.683 85.217,90.302 R2_LightSensor12.2@85.217,88.138 86.509,86.846 86.509,84.956 v1(86.487,84.934)
  Bottom Layer w0.254: v1(75.692,83.566) 76.2,83.058 78.761,83.058 79.523,83.82 79.581,83.82 80.695,84.934 v1(86.487,84.934)
SENS13: ADC8_15.5 R2_LightSensor13.2 U2_LightSensor13.C | length 35.5
  Top Layer w0.254: v1(74.901,82.931) 75.386,82.446 ADC8_15.5@75.386,75.256 ; U2_LightSensor13.C@92.71,91.909 92.71,90.424 92.34,90.054 R2_LightSensor13.2@92.34,88.138 93.726,86.752 v1(93.726,84.934)
  Bottom Layer w0.254: v1(74.901,82.931) 75.282,82.55 78.972,82.55 79.734,83.312 79.792,83.312 80.808,84.328 86.738,84.328 87.344,84.934 v1(93.726,84.934)
SENS14: ADC8_15.6 R2_LightSensor14.2 U2_LightSensor14.C | length 42.5
  Top Layer w0.254: v1(74.422,82.325) 74.736,82.011 ADC8_15.6@74.736,75.256 ; U2_LightSensor14.C@99.822,91.909 99.822,90.689 99.452,90.319 R2_LightSensor14.2@99.452,88.138 100.838,86.752 v1(100.838,85.09)
  Bottom Layer w0.254: v1(74.422,82.325) 74.705,82.042 79.182,82.042 79.944,82.804 80.002,82.804 81.018,83.82 86.948,83.82 87.456,84.328 93.977,84.328 94.217,84.567 100.315,84.567 v1(100.838,85.09)
SENS15: ADC8_15.7 R2_LightSensor15.2 U2_LightSensor15.C | length 50
  Top Layer w0.254: v1(73.729,81.719) 74.086,81.362 ADC8_15.7@74.086,75.256 ; U2_LightSensor15.C@106.934,91.948 106.934,90.6 106.564,90.23 R2_LightSensor15.2@106.564,88.138 107.845,86.857 107.845,84.858 v1(107.823,84.836)
  Bottom Layer w0.254: v1(73.729,81.719) 74.295,81.719 74.48,81.534 79.451,81.534 79.502,81.585 79.502,81.643 80.155,82.296 80.213,82.296 81.229,83.312 87.159,83.312 87.667,83.82 94.187,83.82 94.329,83.961 94.427,84.059 100.665,84.059 101.441,84.836 v1(107.823,84.836)
SENS16: ADC8_15.8 R2_LightSensor16.2 U2_LightSensor16.C | length 56.7
  Top Layer w0.254: v1(73.406,81.026) 73.406,75.286 ADC8_15.8@73.436,75.256 ; U2_LightSensor16.C@114.046,91.909 114.046,90.689 113.665,90.308 R2_LightSensor16.2@113.665,88.138 114.957,86.846 114.957,84.846 v1(114.947,84.836)
  Bottom Layer w0.254: v1(73.406,81.026) 79.661,81.026 80.01,81.375 80.01,81.433 80.365,81.788 80.423,81.788 81.439,82.804 87.369,82.804 87.877,83.312 94.398,83.312 94.539,83.453 94.637,83.551 100.875,83.551 101.553,84.23 108.074,84.23 108.68,84.836 v1(114.947,84.836)
SENS17: ADC16_23.1 R2_LightSensor17.2 U2_LightSensor17.C | length 55.6
  Top Layer w0.254: R2_LightSensor17.2@120.534,88.138 120.534,89.419 121.162,90.047 U2_LightSensor17.C@121.162,91.909 ; R2_LightSensor17.2@120.904,88.138 122.196,86.846 122.196,84.858 v1(122.174,84.836) ; v1(152.654,83.573) 152.654,79.629 v1(153.162,79.121) ; v1(160.909,78.867) ADC16_23.1@160.909,75.311 ADC16_23.1@160.917,75.319
  Bottom Layer w0.254: v1(122.174,84.836) 122.451,85.113 128.514,85.113 129.016,84.611 129.537,84.611 129.54,84.614 135.426,84.614 135.937,84.103 142.33,84.103 143.346,83.087 152.168,83.087 v1(152.654,83.573) ; v1(153.162,79.121) 160.655,79.121 v1(160.909,78.867)
SENS18: ADC16_23.2 R2_LightSensor18.2 U2_LightSensor18.C | length 53.3
  Top Layer w0.254: U2_LightSensor18.C@128.27,91.909 128.27,89.8 127.889,89.419 R2_LightSensor18.2@127.889,88.138 129.286,86.741 v1(129.286,85.217) ; ADC16_23.2@160.259,75.311 160.274,75.326 160.259,75.341 160.274,75.356 v1(160.274,87.757)
  Bottom Layer w0.254: v1(129.286,85.217) 135.541,85.217 136.147,84.611 142.541,84.611 143.557,83.595 151.548,83.595 154.44,86.487 158.2,86.487 159.47,87.757 v1(160.274,87.757)
SENS19: ADC16_23.3 R2_LightSensor19.2 U2_LightSensor19.C | length 46
  Top Layer w0.254: R2_LightSensor19.2@135.001,88.138 135.001,89.535 135.382,89.916 U2_LightSensor19.C@135.382,91.909 ; R2_LightSensor19.2@135.012,88.138 136.398,86.752 v1(136.398,85.217) v1@136.398,85.09 ; v1(159.004,88.392) 159.004,87.626 159.609,87.021 ADC16_23.3@159.609,75.311
  Bottom Layer w0.254: v1(136.398,85.217) 142.653,85.217 143.767,84.103 151.337,84.103 154.229,86.995 157.989,86.995 159.004,88.01 v1(159.004,88.392)
SENS20: ADC16_23.4 R2_LightSensor20.2 U2_LightSensor20.C | length 38.6
  Top Layer w0.254: U2_LightSensor20.C@142.494,91.909 142.494,90.248 142.113,89.867 R2_LightSensor20.2@142.113,88.138 143.637,86.614 v1(143.637,85.09) ; v1(158.242,88.9) 158.242,87.67 158.959,86.953 ADC16_23.4@158.959,75.311
  Bottom Layer w0.254: v1(143.637,85.09) 150.146,85.09 150.625,84.611 151.127,84.611 154.019,87.503 157.779,87.503 158.242,87.966 v1(158.242,88.9)
SENS21: ADC16_23.5 R2_LightSensor21.2 U2_LightSensor21.C | length 29
  Top Layer w0.254: U2_LightSensor21.C@149.606,91.909 149.606,90.17 149.225,89.789 R2_LightSensor21.2@149.225,88.138 150.876,86.487 v1(150.876,85.217) ; v1(157.607,88.392) 157.607,87.586 158.309,86.884 ADC16_23.5@158.309,75.311
  Bottom Layer w0.254: v1(150.876,85.217) 153.67,88.011 157.226,88.011 v1(157.607,88.392)
SENS22: ADC16_23.6 R2_LightSensor22.2 U2_LightSensor22.C | length 17.3
  Top Layer w0.254: U2_LightSensor22.C@156.718,91.909 156.718,90.297 156.337,89.916 R2_LightSensor22.2@156.337,88.138 157.659,86.816 ADC16_23.6@157.659,75.311
SENS23: ADC16_23.7 R2_LightSensor23.2 U2_LightSensor23.C | length 25.3
  Top Layer w0.254: ADC16_23.7@157.009,75.311 157.037,75.283 157.037,74.528 157.009,74.5 157.429,74.08 161.139,74.08 162.179,75.12 162.179,78.814 160.782,80.211 160.782,83.535 162.433,85.186 162.433,87.149 R2_LightSensor23.2@163.449,88.165 ; R2_LightSensor23.2@163.449,88.138 R2_LightSensor23.2@163.449,88.165 ; R2_LightSensor23.2@163.46,88.265 R2_LightSensor23.2@163.449,88.254 ; U2_LightSensor23.C@163.83,91.909 163.83,90.297 163.449,89.916 R2_LightSensor23.2@163.449,88.254 ; R2_LightSensor23.2@163.449,88.165 R2_LightSensor23.2@163.449,88.254
SENS24: ADC16_23.8 R2_LightSensor24.2 U2_LightSensor24.C | length 32.3
  Top Layer w0.254: ADC16_23.8@156.359,75.311 156.359,74.186 156.973,73.572 161.35,73.572 163.957,76.179 v1(163.957,78.486) ; v1(169.799,78.516) 169.799,78.581 170.053,78.835 170.053,84.932 169.841,85.144 169.841,87.164 170.18,87.503 170.18,87.746 R2_LightSensor24.2@170.572,88.138 170.572,90.054 170.942,90.424 U2_LightSensor24.C@170.942,91.909
  Bottom Layer w0.254: v1(163.957,78.486) 163.987,78.516 v1(169.799,78.516)
SENS25: ADC24_31.1 R2_LightSensor25.2 U2_LightSensor25.C | length 59.8
  Top Layer w0.254: R2_LightSensor25.2@177.673,88.138 179.197,86.614 v1(179.197,84.934) ; R2_LightSensor25.2@177.684,88.138 177.684,89.8 178.054,90.17 U2_LightSensor25.C@178.054,91.909 ; ADC24_31.1@221.369,74.925 221.369,81.901 v1(221.383,81.915)
  Bottom Layer w0.254: v1(179.197,84.934) 184.179,84.934 184.706,84.407 184.706,83.394 185.238,82.862 185.74,82.862 186.19,83.312 204.716,83.312 206.592,81.436 208.273,81.436 208.781,81.944 217.04,81.944 217.265,82.169 221.129,82.169 v1(221.383,81.915)
SENS26: ADC24_31.2 R2_LightSensor26.2 U2_LightSensor26.C | length 54.1
  Top Layer w0.254: v1(183.896,83.485) 183.896,87.068 184.796,87.968 R2_LightSensor26.2@184.796,88.138 ; R2_LightSensor26.2@184.785,88.138 184.785,90.181 185.166,90.562 U2_LightSensor26.C@185.166,91.909 ; ADC24_31.2@220.719,74.925 v1(220.719,81.407)
  Bottom Layer w0.254: v1(183.896,83.485) 185.027,82.354 185.95,82.354 186.371,82.775 204.535,82.775 206.382,80.928 208.484,80.928 208.992,81.436 217.25,81.436 217.475,81.661 220.465,81.661 v1(220.719,81.407)
SENS27: ADC24_31.3 R2_LightSensor27.2 U2_LightSensor27.C | length 44.3
  Top Layer w0.254: U2_LightSensor27.C@192.278,91.909 192.278,90.17 191.897,89.789 R2_LightSensor27.2@191.897,88.138 193.421,86.614 v1(193.421,82.169) ; ADC24_31.3@220.069,74.925 220.069,80.877 v1(220.091,80.899)
  Bottom Layer w0.254: v1(193.421,82.169) 204.422,82.169 206.171,80.42 208.694,80.42 209.202,80.928 217.461,80.928 217.686,81.153 219.837,81.153 v1(220.091,80.899)
SENS28: ADC24_31.4 R2_LightSensor28.2 U2_LightSensor28.C | length 36.7
  Top Layer w0.254: U2_LightSensor28.C@199.39,91.909 199.39,90.683 199.009,90.302 R2_LightSensor28.2@199.009,88.138 200.406,86.741 v1(200.406,81.534) ; ADC24_31.4@219.419,74.925 v1(219.419,80.42)
  Bottom Layer w0.254: v1(200.406,81.534) 204.339,81.534 205.961,79.912 208.905,79.912 209.413,80.42 217.671,80.42 217.896,80.645 219.194,80.645 v1(219.419,80.42)
SENS29: ADC24_31.5 R2_LightSensor29.2 U2_LightSensor29.C | length 27.5
  Top Layer w0.254: R2_LightSensor29.2@206.132,88.138 206.132,90.054 206.502,90.424 U2_LightSensor29.C@206.502,91.909 ; R2_LightSensor29.2@206.259,88.138 209.521,84.876 209.521,80.42 v1(210.185,79.756) ; ADC24_31.5@218.769,74.925 218.792,74.948 218.792,79.86 v1(218.769,79.883)
  Bottom Layer w0.254: v1(210.185,79.756) 210.312,79.883 v1(218.769,79.883)
SENS30: ADC24_31.6 R2_LightSensor30.2 U2_LightSensor30.C | length 21.1
  Top Layer w0.254: R2_LightSensor30.2@213.233,88.138 214.757,86.614 v1(214.757,79.121) ; R2_LightSensor30.2@213.244,88.138 213.244,90.319 213.614,90.689 U2_LightSensor30.C@213.614,91.909 ; ADC24_31.6@218.119,74.925 218.186,74.992 v1(218.186,78.825)
  Bottom Layer w0.254: v1(214.757,79.121) 217.89,79.121 v1(218.186,78.825)
SENS31: ADC24_31.7 R2_LightSensor31.2 U2_LightSensor31.C | length 18.4
  Top Layer w0.254: ADC24_31.7@217.469,74.925 217.469,81.738 219.583,83.852 219.583,87.376 R2_LightSensor31.2@220.345,88.138 ; R2_LightSensor31.2@220.356,88.138 220.356,90.23 220.726,90.6 U2_LightSensor31.C@220.726,91.909 U2_LightSensor31.C@220.726,91.948
SENS32: ADC24_31.8 OPTO32.C R2_LightSensor32.2 | length 26.6
  Top Layer w0.254: ADC24_31.8@216.789,74.955 ADC24_31.8@216.819,74.925 216.819,82.551 216.79,82.551 216.789,82.552 v1(216.789,82.677) ; v1(226.568,83.947) 226.568,87.09 227.457,87.979 R2_LightSensor32.2@227.457,88.138 227.457,90.308 227.838,90.689 OPTO32.C@227.838,91.909
  Bottom Layer w0.254: v1(216.789,82.677) 222.389,82.677 223.659,83.947 v1(226.568,83.947)
SYS_SWCLK: 1.24 SWD.2 | length 27.3
  Top Layer w0.254: 1.24@117.641,81.088 118.468,81.915 v1(118.999,81.915) ; v1(134.747,77.089) 134.747,71.983 SWD.2@136.652,70.078
  Bottom Layer w0.254: v1(118.999,81.915) 120.225,81.915 123.429,78.711 130.382,78.711 131.398,77.695 134.236,77.695 134.379,77.552 134.747,77.184 v1(134.747,77.089)
SYS_SWDIO: 1.23 SWD.3 | length 24.7
  Top Layer w0.254: 1.23@118.207,80.523 118.21,80.523 118.775,81.088 v1(119.38,81.088) ; v1(133.985,77.089) 134.112,76.962 SWD.3@134.112,70.078
  Bottom Layer w0.254: v1(119.38,81.088) 120.334,81.088 123.219,78.203 130.172,78.203 131.286,77.089 v1(133.985,77.089)
pads on no net: 1.4 1.6 1.7 1.10 1.14 1.22 1.25 1.29 1.30 ADC0_7.12 ADC0_7.16 ADC8_15.12 ADC8_15.16 ADC16_23.12 ADC16_23.16 ADC24_31.12 ADC24_31.16 OPTO1.1 OPTO32.1 U2_LightSensor2.1 U2_LightSensor3.1 U2_LightSensor4.1 U2_LightSensor5.1 U2_LightSensor6.1 U2_LightSensor7.1 U2_LightSensor8.1 U2_LightSensor9.1 U2_LightSensor10.1 U2_LightSensor11.1 U2_LightSensor12.1 U2_LightSensor13.1 U2_LightSensor14.1 U2_LightSensor15.1 U2_LightSensor16.1 U2_LightSensor17.1 U2_LightSensor18.1 U2_LightSensor19.1 U2_LightSensor20.1 U2_LightSensor21.1 U2_LightSensor22.1 U2_LightSensor23.1 U2_LightSensor24.1 U2_LightSensor25.1 U2_LightSensor26.1 U2_LightSensor27.1 U2_LightSensor28.1 U2_LightSensor29.1 U2_LightSensor30.1 U2_LightSensor31.1
copper on no net:
  other v3: 3.429,66.914 229.108,66.929 225.552,78.105 6.985,78.12 66.548,82.55 166.243,82.55

## Polygon pours and split planes (outlines as drawn)
GND on Top Layer "Top Layer-GND" (solid, pour order 2): 230.505,66.623 230.505,99.441 226.06,99.441 224.155,99.441 1.905,99.441 1.778,99.314 1.905,99.314 1.905,66.623
GND on Top Layer "Top Layer-GND 1" (solid, pour order 18): 148.656,68.02 148.656,65.48 157.405,65.48 157.405,68.02
GND on Top Layer "Top Layer-GND 2" (solid, pour order 16): 209.056,67.818 209.056,65.278 217.805,65.278 217.805,67.818
GND on Top Layer "Top Layer-GND 3" (solid, pour order 6): 6.17,69.478 6.17,65.278 14.986,65.278 14.986,69.45 14.866,69.57 14.775,69.478
GND on Bottom Layer "Bottom Layer-GND" (solid, pour order 14): 112.776,83.82 112.776,78.639 112.776,74.959 117.37,74.959 117.37,83.82
GND on Bottom Layer "Bottom Layer-GND 1" (solid, pour order 12): 123.711,67.691 130.556,67.691 132.842,67.691 132.842,70.485 130.048,70.485 129.54,69.85 123.711,69.85
GND on Bottom Layer "Bottom Layer-GND 2" (solid, pour order 10): 8.068,76.216 8.068,73.009 22.287,73.009 22.352,73.074 22.352,76.216
GND on Bottom Layer "Bottom Layer-GND 3" (solid, pour order 8): 2.032,99.314 2.032,89.456 230.505,89.456 230.505,99.06

## Silkscreen, mask and mechanical layers (free items; w line width, h text height)
Mechanical 1:
  the board outline again, w1